# Altium PCB iotv2.PcbDoc
Units mm, origin at the board's own origin, x right, y up, seen from the top; angles counter-clockwise.
Board outline 100 x 100 mm, 2 copper layers (Top Layer, Bottom Layer); 52 components, 46 nets, 156 pads, 0 vias.
Unrouted connection lines stored in the file: 1.
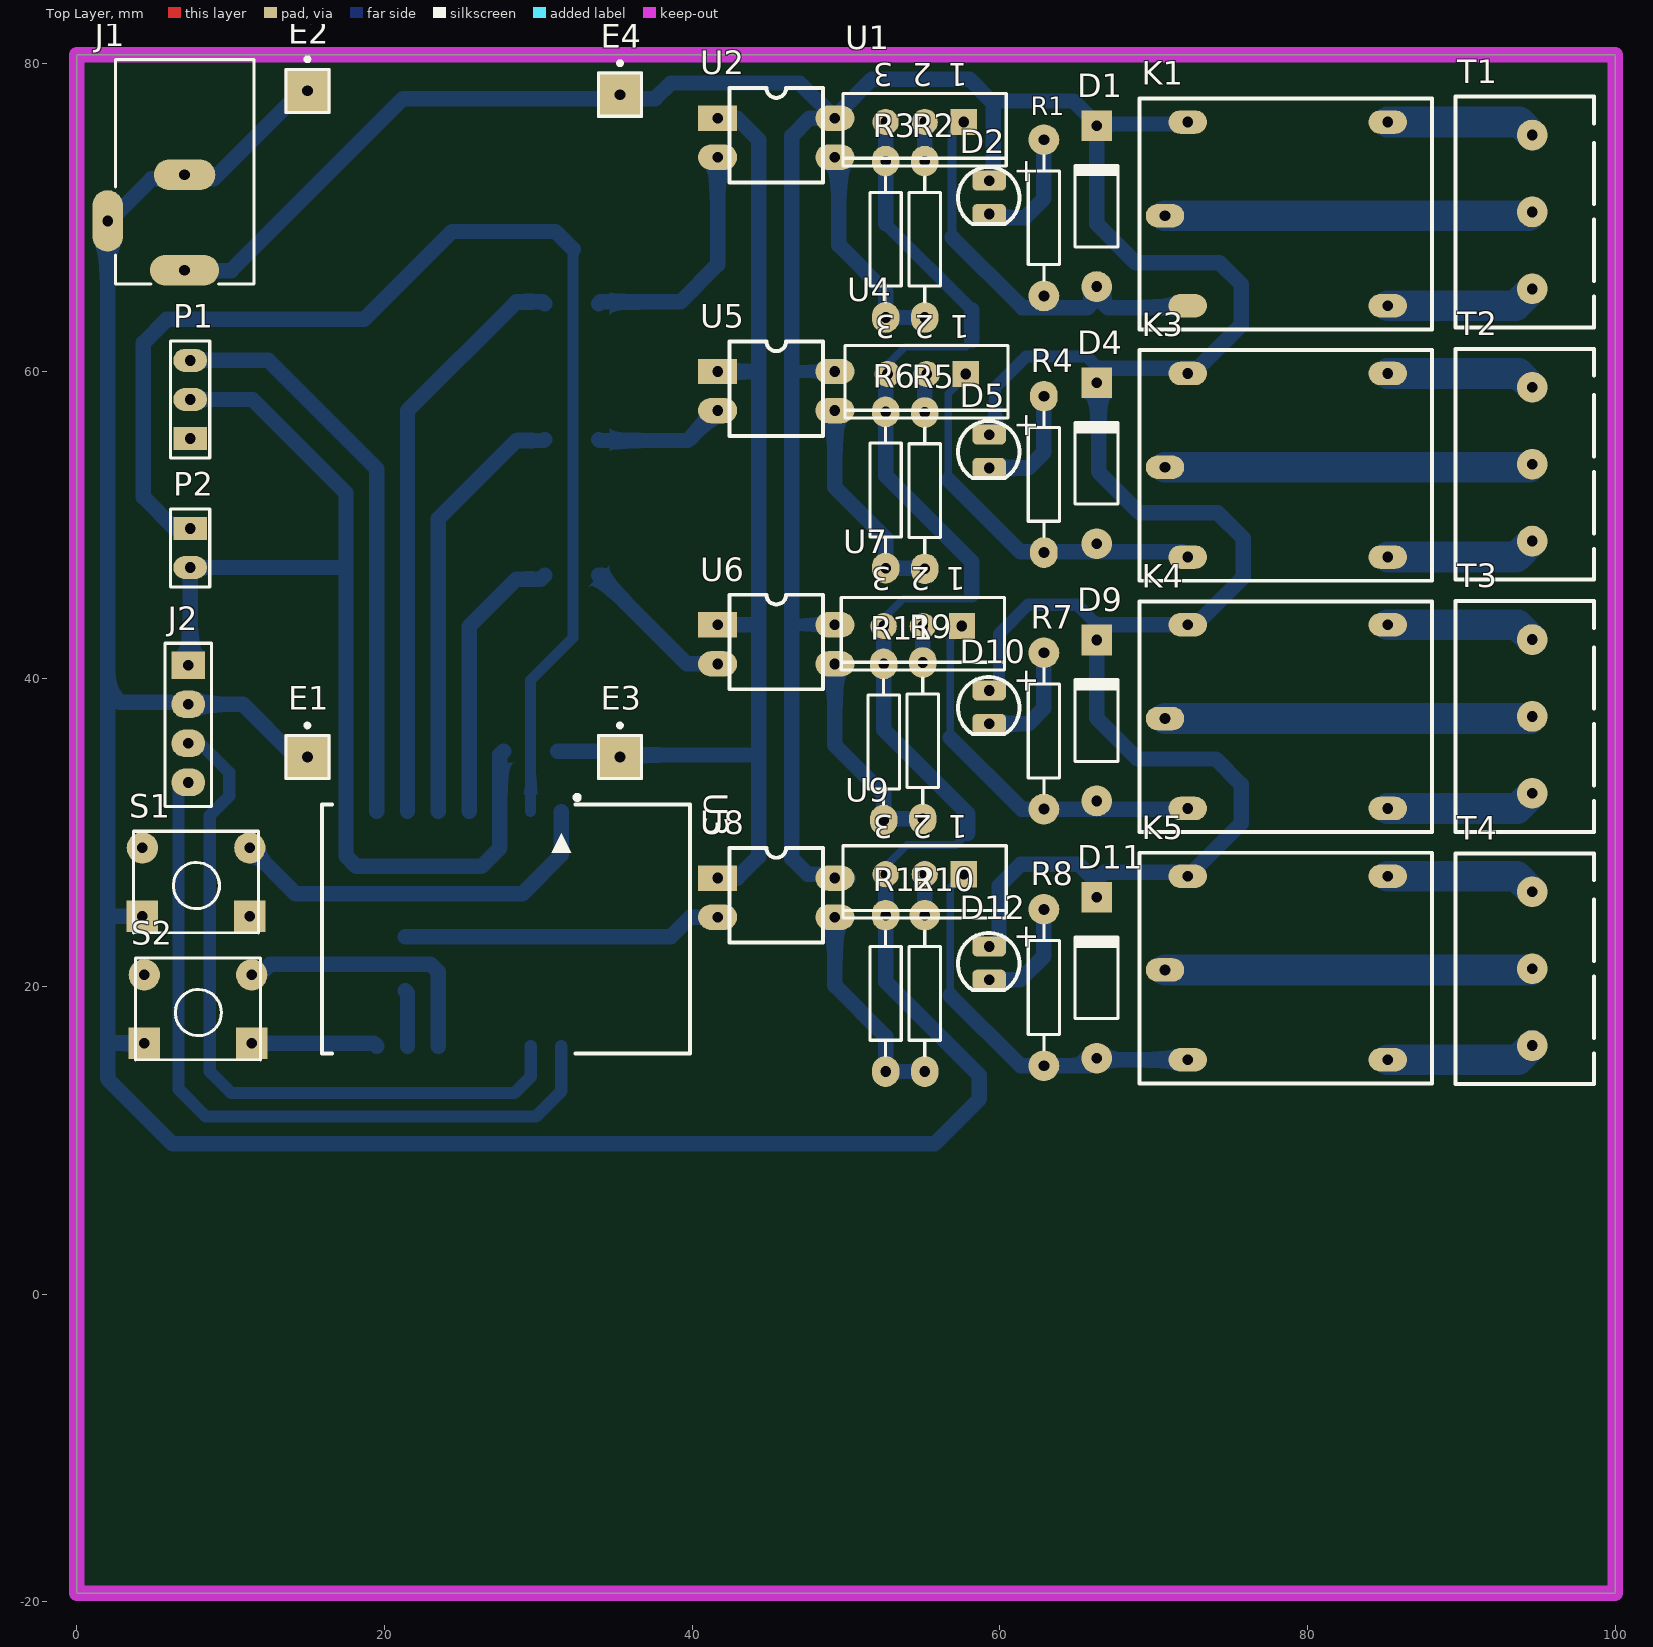
[diagram p0: Top Layer view]
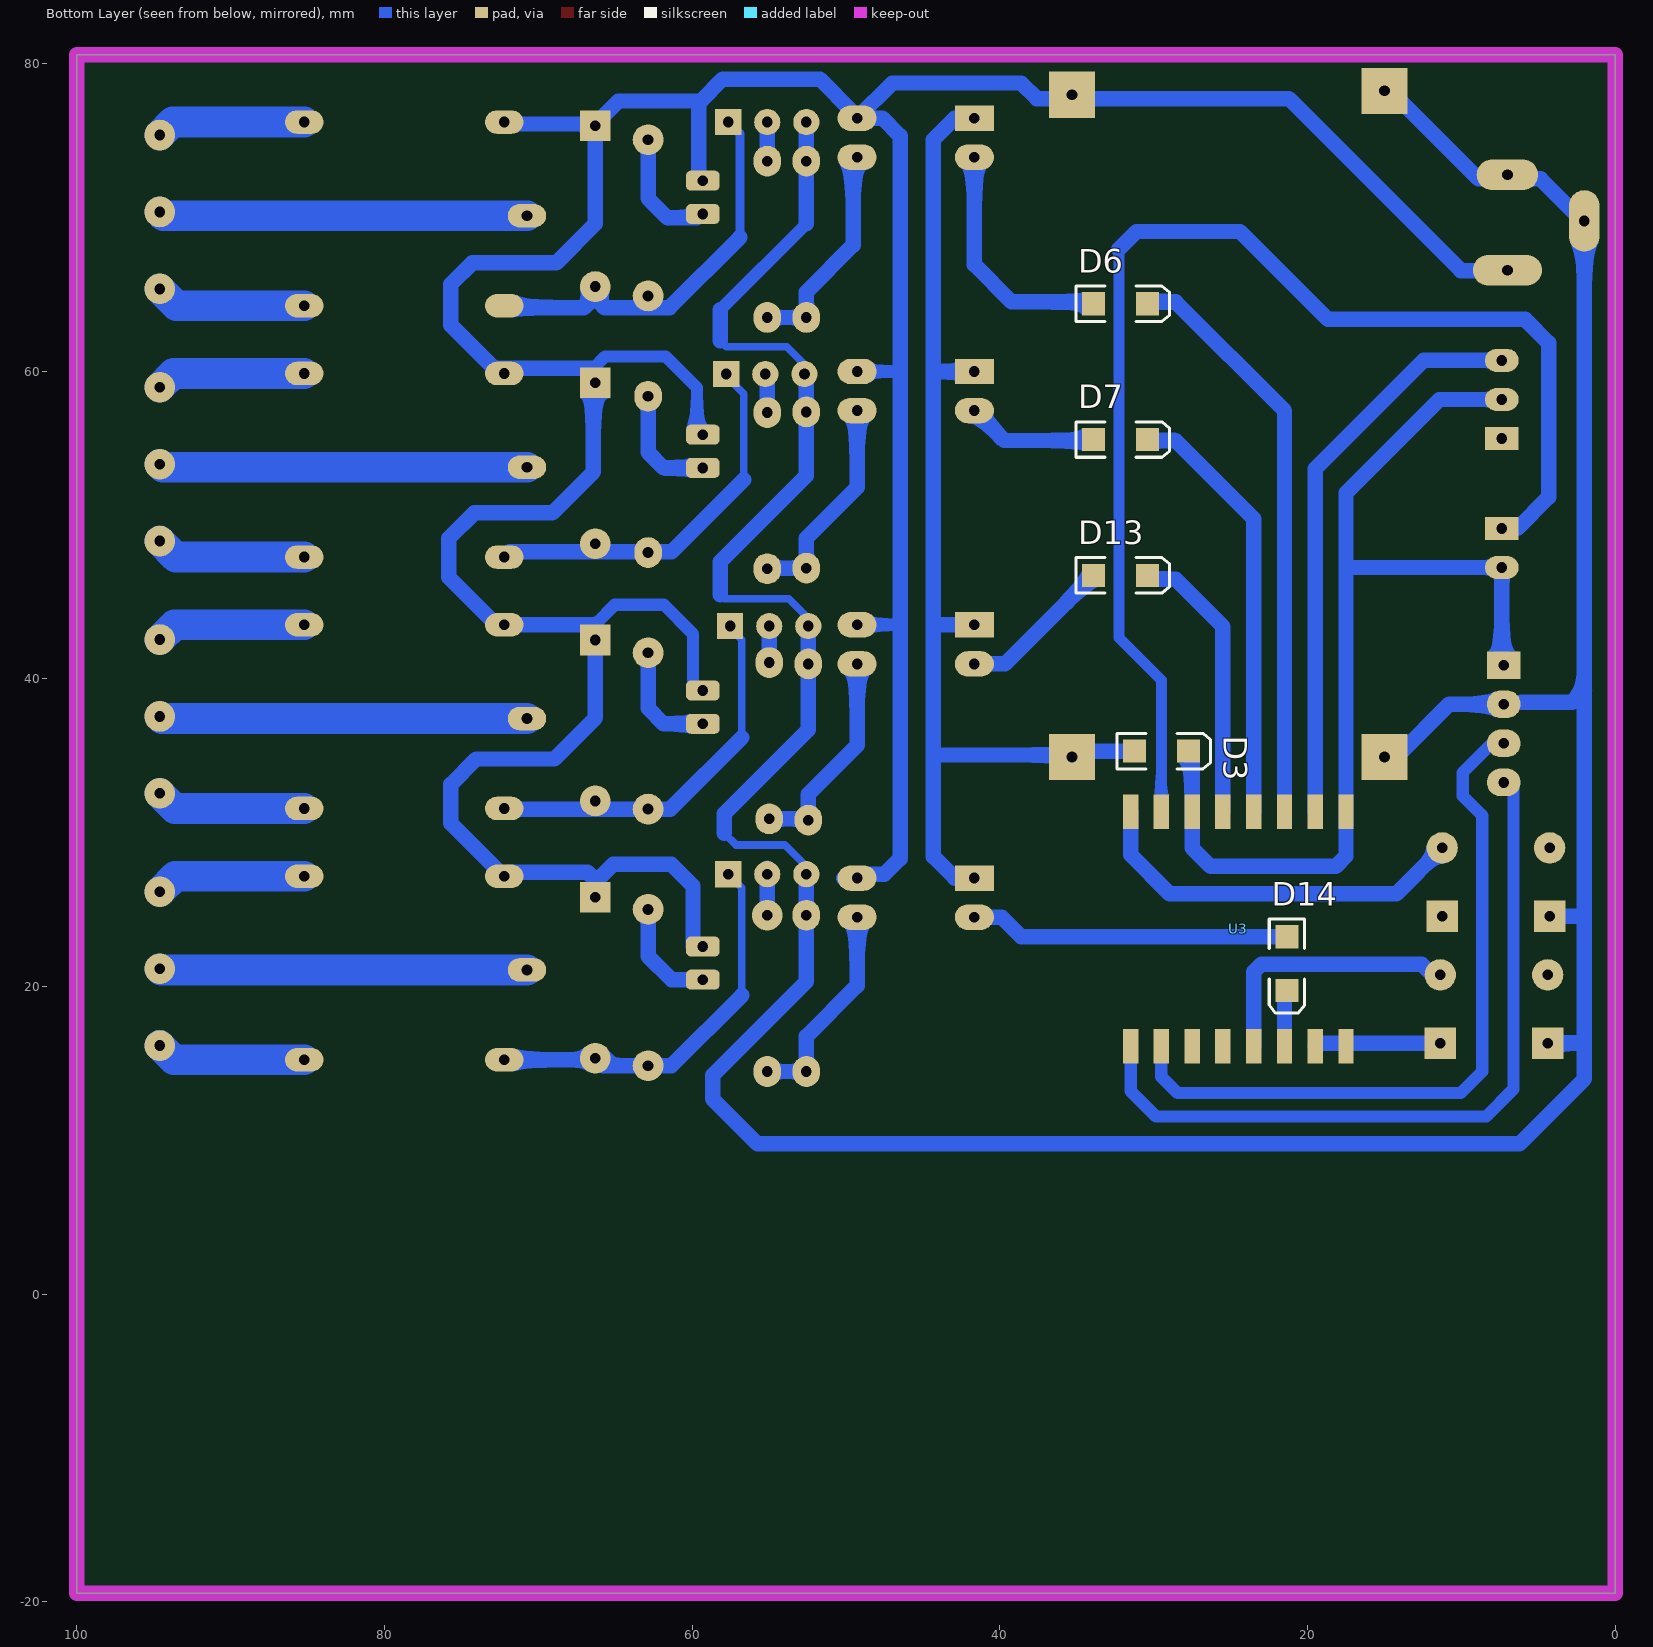
[diagram p1: Bottom Layer view, seen from below]

## Layer stack, top to bottom
Top Solder: solder mask 0.0102, Solder Resist, Dk 3.5
Top Layer: signal copper 0.0356
Dielectric 1: dielectric 0.32, FR-4, Dk 4.8
Bottom Layer: signal copper 0.0356
Bottom Solder: solder mask 0.0102, Solder Resist, Dk 3.5

## Board outline
0,-19.431 100,-19.431 100,80.569 0,80.569

## Design rules (kind name [scope] priority, off if disabled: settings)
Clearance [All] p1: gap=0.254 ignorepadtopadclearanceinfootprint=FALSE except(0: Arc-Hole Track-Hole SMDPad-Hole THPad-Hole Via-Hole Fill-Hole Poly-Hole Region-Hole Text-Hole)
PolygonConnect [All] p1: connectstyle=Relief reliefconductorwidth=0.254 reliefentries=4 polygonreliefangle="90 Angle" airgapwidth=0.254
RoomDefinition iotv2 [InComponentClass('iotv2')] p1: confinementstyle=ConfineIn formatcopy=TRUE lockcomponents=FALSE outline 144.907,-24.003 247.904,-24.003 247.904,4.064 144.907,4.064
RoutingLayers [All] p1: top layer_v5=FALSE bottom layer_v5=TRUE
RoutingVias [All] p1: holewidth=0.711 width=2.5 viastyle="Through Hole" minholewidth=0.711 minwidth=1.27 maxholewidth=0.711 maxwidth=2
SolderMaskExpansion [All] p1: expansion=0.102
Width [All] p1: maxlimit=2 minlimit=0.5 preferedwidth=1
29 further rules are at their usual default settings.

## Components (designator, comment, footprint, x,y, rotation, side; value= is the part's Value field where it differs from the comment)
D1 "Diode 1N4007" DO-41 66.294,70.739 r90 top
D2 "LED 3mm" LED-3mm 59.182,71.374 r0 top
D3 "D Tunnel1" 3.2X1.6X1.1 29.492,35.306 r180 bottom
D4 "Diode 1N4007" DO-41 66.294,54.017 r90 top
D5 "LED 3mm" LED-3mm 59.182,54.864 r0 top
D6 "D Tunnel1" 3.2X1.6X1.1 32.159,64.389 r180 bottom
D7 "D Tunnel1" 3.2X1.6X1.1 32.159,55.562 r180 bottom
D9 "Diode 1N4007" DO-41 66.294,37.296 r90 top
D10 "LED 3mm" LED-3mm 59.182,38.227 r0 top
D11 "Diode 1N4007" DO-41 66.294,20.574 r90 top
D12 "LED 3mm" LED-3mm 59.182,21.59 r0 top
D13 "D Tunnel1" 3.2X1.6X1.1 32.159,46.736 r180 bottom
D14 "D Tunnel1" 3.2X1.6X1.1 21.336,21.491 r270 bottom
E1 "Antenna" PIN1 14.986,34.925 r0 top
E2 "Antenna" PIN1 14.986,78.232 r0 top
E3 "Antenna" PIN1 35.306,34.925 r0 top
E4 "Antenna" PIN1 35.306,77.978 r0 top
J1 "PWR2.5" KLD-0202 7.001,80.271 r270 top
J2 "Header4X1" "HEADER 4X1" 7.239,40.894 r270 top
K1 "Relay-12vDC" Relays#1 69.088,77.724 r270 top
K3 "Relay-12vDC" Relays#2 69.088,61.383 r270 top
K4 "Relay-12vDC" Relays#2 69.088,45.043 r270 top
K5 "Relay-12vDC" Relays#2 69.088,28.702 r270 top
P1 "Header 3" HDR1X3 7.366,55.626 r90 top
P2 "Header 2" HDR1X2 7.366,49.784 r270 top
R1 "Res2" AXIAL-0.4#1 62.865,69.977 r270 top value=1K
R2 "Res2" AXIAL-0.4#2 55.118,68.58 r90 top value=1K
R3 "Res2" AXIAL-0.4#2 52.578,68.58 r90 top value=1K
R4 "Res2" AXIAL-0.4#2 62.865,53.298 r270 top value=1K
R5 "Res2" AXIAL-0.4#2 55.118,52.239 r90 top value=1K
R6 "Res2" AXIAL-0.4#2 52.578,52.282 r90 top value=1K
R7 "Res2" AXIAL-0.4#1 62.865,36.618 r270 top value=1K
R8 "Res2" AXIAL-0.4#1 62.865,19.939 r270 top value=1K
R9 "Res2" AXIAL-0.4#2 54.991,35.983 r90 top value=1K
R10 "Res2" AXIAL-0.4#3 55.118,19.558 r90 top value=1K
R11 "Res2" AXIAL-0.4#2 52.451,35.899 r90 top value=1K
R12 "Res2" AXIAL-0.4#2 52.578,19.558 r90 top value=1K
S1 "PUSH BUTTON DOUBLE" "PUSH BUTTON" 7.747,26.797 r180 top
S2 "PUSH BUTTON DOUBLE" "PUSH BUTTON" 7.874,18.542 r180 top
T1 "Terminal" "Terminal 1*3" 98.615,62.858 r90 top
T2 "Terminal" "Terminal 1*3" 98.615,46.459 r90 top
T3 "Terminal" "Terminal 1*3" 98.615,30.061 r90 top
T4 "Terminal" "Terminal 1*3" 98.615,13.662 r90 top
U1 "L4931CV30" TO-220A 55.118,76.2 r180 top
U2 "PC817" DIP4 41.656,76.454 r0 top
U3 "ESP_12" ESP_12 31.496,31.744 r270 top
U4 "L4931CV30" TO-220A 55.245,59.817 r180 top
U5 "PC817" DIP4 41.656,59.986 r0 top
U6 "PC817" DIP4 41.656,43.519 r0 top
U7 "L4931CV30" TO-220A 54.991,43.434 r180 top
U8 "PC817" DIP4 41.656,27.051 r0 top
U9 "L4931CV30" TO-220A 55.118,27.305 r180 top

## Footprints (in the part's own frame and the unit in brackets; to place one, negate y for a bottom-side part, rotate by r counter-clockwise, add the part's x,y. Pads: shape width x height; smd on the part's side, far side on the other; paste and mask are expansions set on the pad)
3.2X1.6X1.1 [mm] "SMT LED; 2 Flat Leads"
  rect 1.5x1.5 smd: 1(-1.75,0) 2(1.75,0)
  silkscreen extent -2.9,-1.15 3.2,1.15
AXIAL-0.4#1 [mm] "Axial Device, Thru-Hole; 2 Leads; 0.4 in Pin Spacing"
  round 2 hole 0.7: 1(-5.08,0) 2(5.08,0)
  silkscreen extent -4.06,-1.02 4.06,1.02
AXIAL-0.4#2 [mm] "Axial Device, Thru-Hole; 2 Leads; 0.4 in Pin Spacing"
  oval 2x1.8 hole 0.7: 1(-5.08,0) 2(5.08,0)
  silkscreen extent -4.06,-1.02 4.06,1.02
AXIAL-0.4#3 [mm] "Axial Device, Thru-Hole; 2 Leads; 0.4 in Pin Spacing"
  oval 2x1.8 hole 0.7: 1(-5.08,0)
  round 2 hole 0.7: 2(5.08,0)
  silkscreen extent -4.06,-1.02 4.06,1.02
DIP4 [mm]
  rect 2.54x1.651 hole 0.7: 1(0,0)
  oval 2.54x1.651 hole 0.7: 2(0,-2.54) 3(7.62,-2.54) 4(7.62,0)
  silkscreen extent 0.76,-4.19 6.86,1.96, body extent -0.13,-3.56 7.75,1.03, height 4.3
DO-41 [mm] "Diode, Axial; Body 5.2 x 2.7 mm (LxDia. max), Lead Dia. 0.86 mm (max)"
  round 2 hole 0.7: 1(-5.23,0)
  rect 2x2 hole 0.7: 2(5.23,0)
  silkscreen extent -2.65,-1.4 2.75,1.4
ESP_12 [mm] "ESP-12 Wi-Fi Module by AI-Thinker"
  rect 2.25x1 smd far side: 1(0.375,0) 2(0.375,-2) 3(0.375,-4) 4(0.375,-6) 5(0.375,-8) 6(0.375,-10) 7(0.375,-12) 8(0.375,-14) 9(15.625,-14) 10(15.625,-12) 11(15.625,-10) 12(15.625,-8) 13(15.625,-6) 14(15.625,-4) 15(15.625,-2) 16(15.625,0)
  silkscreen extent -0.7,-15.57 16.08,8.37, body extent 0,-15.49 16,8.51, height 2.75
HDR1X2 [mm] "Connector; Header; 2 Position"
  rect 1.5x2.2 hole 0.7: 1(0,0)
  oval 1.5x2.2 hole 0.7: 2(2.54,0)
  silkscreen extent -1.27,-1.27 3.81,1.27
HDR1X3 [mm] "Connector; Header; 3 Position"
  rect 1.5x2.2 hole 0.7: 1(0,0)
  oval 1.5x2.2 hole 0.7: 2(2.54,0) 3(5.08,0)
  silkscreen extent -1.27,-1.27 6.35,1.27
"HEADER 4X1" [mm]
  rect 1.8x2.2 hole 0.7: 1(0,0)
  oval 1.8x2.2 hole 0.7: 2(2.54,0) 3(5.08,0) 4(7.62,0)
  silkscreen extent -1.43,-1.5 9.18,1.5, body extent -1.19,-1.22 8.97,1.32, height 8.38
KLD-0202 [mm] "DC Power Jack, 2.5mm, KLD Series, PCB Mount"
  oval 2x4.5 hole 0.7: 1(13.7,0)
  round 1.5 all layers, no hole: 1A(13.7,-1.25) 1B(13.7,1.25) 2A(7.5,-1) 2B(7.5,1) 3A(9.5,-5) 3B(11.5,-5)
  oval 2x4 hole 0.7: 2(7.5,0)
  oval 4x2 hole 0.7: 3(10.5,-5)
  silkscreen extent 0,-4.5 14.6,4.5
LED-3mm [mm] "LED; 2 Leads"
  rrect50% 2.2x1.3 hole 0.7: 1(0.127,1.016) 2(0.127,-1.143)
  silkscreen extent -1.9,-1.81 2.09,1.89
PIN1 [mm] "Generic Antenna; 1 Lead"
  rect 3x3 hole 0.7: 1(0,0)
  silkscreen extent -1.4,-1.4 1.4,2.17
"PUSH BUTTON" [mil]
  rect 80x80 hole 27.56: 1(-137.5,87.5) 2(137.5,87.5)
  round 80 hole 27.56: 3(-137.5,-87.5) 4(137.5,-87.5)
  silkscreen extent -160,-130 160,130, body extent -155,-121 157,123, height 205
Relays#1 [mil]
  oval 60x98.43 hole 27.56: 1(300,65) 2(60,635) 3(530,635) 4(60,123.11)
  oval 60x98.43 all layers, no hole: 5(530,123.11)
  silkscreen extent 0,0 591,748
Relays#2 [mil]
  oval 60x98.43 hole 27.56: 1(300,65) 2(60,635) 3(530,635) 4(60,123.11) 5(530,123.11)
  silkscreen extent 0,0 591,748
"Terminal 1*3" [mm]
  round 2 hole 0.7: 1(2.5,4) 2(7.5,4) 3(12.5,4)
  silkscreen extent 0,0 15,9
TO-220A [mm] "TO, Thru-Hole, Vertical, Heatsink Mounted; 3 In-Line Leads; Pitch 2.54 mm"
  rect 1.7x1.7 hole 0.7: 1(-2.54,0)
  round 1.7 hole 0.7: 2(0,0) 3(2.54,0)
  silkscreen extent -5.3,-1.85 5.3,2.85

## Part data
D1 D4 D9 D11: "1 Amp General Purpose Rectifier", Code_JEDEC=DO-204-AL, ComponentLink1Description="Manufacturer Link", ComponentLink1URL=http://www.fairchildsemi.com/, ComponentLink2Description=Datasheet, ComponentLink2URL=http://www.fairchildsemi.com/ds/1N%2F1N4001.pdf, DatasheetVersion=1998, LatestRevisionDate=17-Jul-2002, LatestRevisionNote="Re-released for DXP Platform.", PackageDescription="Diode, Axial; Body 5.2 x 2.7 mm (LxDia. max), Lead Dia. 0.86 mm (max)", PackageReference=DO-41, PackageVersion=Aug-1999, Published=8-Jun-2000, Publisher="Altium Limited"
D2 D5 D10 D12: "Typical LED", Designer="Seyed Mohsen Ghasemian", PackageDescription="LED; 2 Leads", PackageReference=LED, Published=02/04/2012, Publisher=www.picpars.com
D3 D6 D7 D13 D14: "Tunnel Diode - RLC Model", LatestRevisionDate=17-Jul-2002, LatestRevisionNote="Re-released for DXP Platform.", PackageDescription="SM LED; 2 Flat Leads", PackageReference=3.2X1.6X1.1, PackageVersion=Feb-2002, Published=8-Jun-2000, Publisher="Altium Limited"
E1 E2 E3 E4: "Generic Antenna", LatestRevisionDate=17-Jul-2002, LatestRevisionNote="Re-released for DXP Platform.", PackageReference=PIN1, Published=24-Mar-1999, Publisher="Altium Limited"
J1: "Low Voltage Power Supply Connector", ComponentLink1Description="Manufacturer Link", ComponentLink1URL=http://domino.kycon.com/internet/Products.html, DatasheetDocument=09-May-2002, Published=17-Dec-2003, Publisher="Altium Limited"
K1 K3 K4 K5: library part Relay-05vDC, "Relay-05vDC-240AC 5A", ComponentLinkURL=www.picpars.com, Designer="Seyed Mohsen Ghasemain"
P1: "Header, 3-Pin", LatestRevisionDate=17-Jul-2002, LatestRevisionNote="Re-released for DXP Platform.", Publisher="Altium Limited"
P2: "Header, 2-Pin", LatestRevisionDate=17-Jul-2002, LatestRevisionNote="Re-released for DXP Platform.", Publisher="Altium Limited"
R1 R2 R3 R4 R5 R6 R7 R8 R9 R10 R11 R12: "Resistor", LatestRevisionDate=17-Jul-2002, LatestRevisionNote="Re-released for DXP Platform.", PackageDescription="Axial Device, Thru-Hole; 2 Leads; 0.4 in Pin Spacing", PackageReference=AXIAL-0.4, Published=8-Jun-2000, Publisher="Altium Limited"
S1 S2: "Switch"
T1 T2 T3 T4: library part "Terminal 1*3", "Terminal 3 Pin 250VAC 16A", ComponentLinkURL=www.picpars.com, Designer="Seyed Mohsen Ghasemain", E-mail=picpars@gmail.com
U1 U4 U7 U9: "250mA, Very Low Drop ( 0.4V) Voltage Regulator", ComponentLink1Description="Manufacturer Link", ComponentLink1URL=http://www.st.com/, ComponentLink2Description=Datasheet, ComponentLink2URL=http://www.st.com/stonline/products/literature/ds/4340/l4931abxx15.pdf, DatasheetVersion=Apr-1999, LatestRevisionDate=06-Jun-2005, LatestRevisionNote="PCB Pin sequence re-ordered.", PackageDescription="TO, Thru-Hole, Vertical, Heatsink Mounted; 3 In-Line Leads; Pitch 2.54 mm", PackageReference=TO-220A, PackageVersion=Jul-2004, Published=24-Aug-2001, Publisher="Altium Limited"
U2 U5 U6 U8: library part OPTCOUPLER_01, "4-Pin Phototransistor Optocoupler"
U3: "ESP-12 Wi-Fi Module by AI-Thinker", IC=ESP8266-EX, Vendor=Ai-thinker

## Nets (pads, with @x,y where several pads share a name; then routed paths per layer and width w, separated by ;. In a path a pad name is that pad's centre, name@x,y a point inside that pad or via, vN(x,y) a via of type N, cw(c..) or ccw(c..) an arc to the next point about the centre after c; other vN are vias at no path point)
ADC: P2.1 U3.2 | length 83
  Bottom Layer w0.7: U3.2@29.496,31.379 29.496,39.91 32.258,42.672 32.258,67.945
  Bottom Layer w1: P2.1 6.35,49.784 4.318,51.816 4.318,61.849 5.842,63.373 18.669,63.373 24.384,69.088 31.115,69.088 32.258,67.945
btn: S2.3 U3.12 | length 17.5
  Bottom Layer w1: S2.3 11.874,20.764 12.573,21.463 22.987,21.463 23.496,20.954 U3.12@23.496,16.129
dht: P1.3 U3.7 | length 37.3
  Bottom Layer w1: P1.3 12.446,60.706 19.496,53.656 U3.7@19.496,31.379
GND: E1.1 E2.1 J1.2 J1.2A J1.2B J1.3 J1.3A J1.3B J2.2 R3.2 R6.2 R11.2 R12.2 S1.2 S2.2 U1.3 U4.3 U7.3 U9.3 | length 237.3
  Bottom Layer w0.5: 2.001,20.955 2.191,20.764 ; U7.3 52.451,43.942 53.721,45.212 57.912,45.212 58.166,45.466 ; U9.3 52.451,27.432 52.451,27.686 53.975,29.21 57.15,29.21 57.912,29.972 ; U4.3 52.705,60.452 53.848,61.595 57.785,61.595 58.166,61.976
  Bottom Layer w0.8: 52.578,69.596 58.166,64.008
  Bottom Layer w1: J1.3 J1.3B 2.001,39.274 ; J1.3@2.052,69.72 4.842,72.51 8.001,72.51 8.883,72.51 E2.1@15.113,78.74 ; S1.2 2.318,24.575 2.001,24.892 ; S2.2 2.191,16.319 2.001,16.51 ; 6.096,38.481 2.794,38.481 2.001,39.274 ; J2.2 10.795,38.354 14.097,35.052 E1.1@14.859,35.052 ; U7.3 R11.2 52.451,36.703 57.912,31.242 57.912,29.972 ; U9.3 R12.2 52.578,20.32 58.674,14.224 58.674,12.7 55.753,9.779 6.223,9.779 2.001,14.001 2.001,16.51 ; 52.578,69.596 R3.2 U1.3 ; U4.3 52.578,59.69 R6.2 52.578,53.213 58.166,47.625 58.166,45.466 ; 58.166,61.976 58.166,64.008 ; 2.001,16.51 2.001,20.955 2.001,24.892 ; 2.001,24.892 2.001,39.274
NetD1_1: D1.1 K1.5 R1.2 U1.1 | length 25.7
  Bottom Layer w0.6: 56.896,68.707 56.896,75.438 U1.1
  Bottom Layer w1: 56.896,68.707 61.468,64.135 65.682,64.135 66.294,64.747 66.444,64.747 67.056,64.135 K1.5@72.342,64.135
NetD2_2: D2.2 R1.1 | length 7.1
  Bottom Layer w1: D2.2@59.69,69.977 61.595,69.977 62.865,71.247 R1.1@62.865,74.676
NetD4_1: D4.1 K3.5 R4.2 U4.1 | length 25.4
  Bottom Layer w0.5: 56.642,52.959 56.642,58.547 57.785,59.69 U4.1 U4.1@57.531,59.563
  Bottom Layer w1: 56.642,52.959 61.341,48.26 66.294,48.26 71.876,48.26 K3.5
NetD5_2: D5.2 R4.1 | length 7.6
  Bottom Layer w1: D5.2 61.849,53.721 62.865,54.737 R4.1
NetD6_1: D6.1 U2.2 | length 15.8
  Bottom Layer w1: D6.1 34.036,64.516 39.243,64.516 41.656,66.929 U2.2
NetD7_1: D7.1 U5.2 | length 8.6
  Bottom Layer w1: D7.1 33.972,55.499 39.709,55.499 U5.2
NetD9_1: D9.1 K4.5 R7.2 U7.1 | length 24.9
  Bottom Layer w0.5: 56.769,36.195 56.769,42.545 57.531,43.307 U7.1
  Bottom Layer w1: 56.769,36.195 61.426,31.538 R7.2 72.173,31.538 K4.5
NetD10_2: D10.2 R7.1 | length 7.6
  Bottom Layer w1: D10.2 61.849,37.084 62.865,38.1 R7.1
NetD11_1: D11.1 K5.5 R8.2 U9.1 | length 25.8
  Bottom Layer w0.5: 56.769,19.431 56.769,26.416 U9.1
  Bottom Layer w1: 56.769,19.431 61.341,14.859 R8.2 65.809,14.859 D11.1 66.398,15.24 K5.5
NetD12_2: D12.2 R8.1 | length 7.1
  Bottom Layer w1: D12.2@59.436,20.447 61.341,20.447 62.865,21.971 R8.1
NetD13_1: D13.1 U6.2 | length 10.4
  Bottom Layer w1: D13.1@34.159,46.736 D13.1 39.666,40.979 U6.2
NetD14_1: D14.1 U8.2 | length 20.8
  Bottom Layer w1: D14.1 38.608,23.241 39.878,24.511 U8.2
NetK1_1: K1.1 T1.2 | length 24
  Bottom Layer w2: K1.1 94.361,70.104 T1.2
NetK1_2: K1.2 T1.3 | length 9.7
  Bottom Layer w2: K1.2 93.773,76.2 T1.3
NetK1_3: K1.3 T1.1 | length 9.9
  Bottom Layer w2: K1.3 93.519,64.262 T1.1
NetK3_1: K3.1 T2.2 | length 24
  Bottom Layer w2: K3.1 94.419,53.763 T2.2
NetK3_2: K3.2 T2.3 | length 9.8
  Bottom Layer w2: K3.2 93.715,59.859 T2.3
NetK3_3: K3.3 T2.1 | length 9.8
  Bottom Layer w2: K3.3 93.577,47.921 T2.1
NetK4_1: K4.1 T3.2 | length 23.9
  Bottom Layer w2: K4.1 94.477,37.423 T3.2
NetK4_2: K4.2 T3.3 | length 9.8
  Bottom Layer w2: K4.2 93.657,43.519 T3.3
NetK4_3: K4.3 T3.1 | length 9.8
  Bottom Layer w2: K4.3 93.635,31.581 T3.1
NetK5_1: K5.1 T4.2 | length 23.9
  Bottom Layer w2: K5.1 94.535,21.082 T4.2
NetK5_2: K5.2 T4.3 | length 9.8
  Bottom Layer w2: K5.2 93.599,27.178 T4.3
NetK5_3: K5.3 T4.1 | length 9.8
  Bottom Layer w2: K5.3 93.693,15.24 T4.1
NetR2_1: R2.1 R3.1 U2.3 | length 14.1
  Bottom Layer w1: U2.3@49.53,73.914 49.53,68.199 52.578,65.151 52.578,63.754 52.832,63.5 R2.1
NetR2_2: R2.2 U1.2 | length 2.9
  Bottom Layer w0.5: R2.2@55.118,73.152 R2.2@55.372,73.406
  Bottom Layer w1: R2.2 U1.2
NetR5_1: R5.1 R6.1 U5.3 | length 14.2
  Bottom Layer w1: U5.3 49.276,52.451 52.578,49.149 R6.1 55.076,47.202 R5.1
NetR5_2: R5.2 U4.2 | length 2.6
  Bottom Layer w1: R5.2 55.118,59.69 U4.2
NetR9_1: R9.1 R11.1 U6.3 | length 14.1
  Bottom Layer w1: U6.3 49.276,35.687 52.451,32.512 R11.1 52.536,30.903 R9.1
NetR9_2: R9.2 U7.2 | length 2.4
  Bottom Layer w1: R9.2 U7.2
NetR10_1: R10.1 R12.1 U8.3 | length 13.9
  Bottom Layer w1: U8.3 49.276,20.066 52.578,16.764 R12.1 R10.1
NetR10_2: R10.2 U9.2 | length 3
  Bottom Layer w1: R10.2 U9.2 U9.2@55.118,27.686
NetS2_1: S2.1 U3.9 U3.10 | length 8.2
  Bottom Layer w1: S2.1 19.305,16.319 U3.10@19.496,16.129
O1: D6.2 U3.6 | length 38
  Bottom Layer w1: U3.6@21.496,31.379 21.496,57.437 28.575,64.516 30.282,64.516 D6.2
O2: D7.2 U3.5 | length 28.1
  Bottom Layer w1: U3.5@23.496,31.379 23.496,50.42 28.575,55.499 30.345,55.499 D7.2
O3: D13.2 U3.4 | length 18.3
  Bottom Layer w1: U3.4@25.496,31.379 25.496,43.403 28.575,46.482 30.155,46.482 D13.2
O4: D14.2 U3.11 | length 3.7
  Bottom Layer w1: D14.2 21.496,19.581 U3.11
rst: S1.3 U3.1 | length 25.3
  Bottom Layer w1: S1.3 14.224,26.035 28.956,26.035 31.496,28.575 U3.1 U3.1@31.496,31.379
rx: J2.3 U3.15 | length 47.3
  Bottom Layer w0.5: J2.3 J2.3@8.001,35.814
  Bottom Layer w0.8: J2.3@8.001,35.814 9.906,33.909 9.906,32.385 8.636,31.115 8.636,14.478 10.033,13.081 28.448,13.081 29.496,14.129 U3.15 U3.15@29.496,16.129
tx: J2.4 U3.16 | length 49.8
  Bottom Layer w0.5: J2.4@6.604,33.274 J2.4
  Bottom Layer w0.8: J2.4@6.604,33.274 6.604,13.335 8.382,11.557 29.845,11.557 31.496,13.208 U3.16 U3.16@31.496,16.129
VCC: D1.2 D2.1 D4.2 D5.1 D9.2 D10.1 D11.2 D12.1 E4.1 J1.1 J1.1A J1.1B K1.4 K3.4 K4.4 K5.4 U2.4 U5.4 U6.4 U8.4 | length 266.1
  Bottom Layer w0.5: 66.23,43.624 66.294,43.561 66.294,43.519 66.294,42.672 D9.2
  Bottom Layer w0.8: 46.482,43.561 46.524,43.519 U6.4 ; 46.482,60.325 46.821,59.986 U5.4 ; D5.1@59.69,55.88 59.69,58.928 61.722,60.96 65.659,60.96 D4.2@66.421,60.198 ; D10.1@59.944,39.497 59.944,42.926 61.849,44.831 65.024,44.831 66.23,43.624 ; D9.2@66.739,43.116 D9.2@66.812,43.043
  Bottom Layer w1: J1.1 7.024,66.548 10.033,66.548 21.209,77.724 37.592,77.724 38.608,78.74 46.99,78.74 U2.4 47.625,76.454 46.482,75.311 46.482,60.325 46.482,43.561 46.482,28.321 47.498,27.305 49.022,27.305 U8.4 U8.4@50.165,27.051 ; U2.4@49.53,76.454 49.53,76.835 51.689,78.994 58.015,78.994 59.436,77.573 ; D2.1@59.563,72.39 59.563,77.446 59.436,77.573 ; D12.1@59.944,22.606 59.944,26.543 61.341,27.94 65.151,27.94 D11.2@66.294,26.797 ; D11.2 D11.2@66.294,26.797 ; D9.2 66.294,37.465 68.961,34.798 74.041,34.798 75.692,33.147 75.692,30.607 K5.4@72.602,27.517 ; D9.2@66.294,42.672 D9.2@66.739,43.116 ; 66.294,43.561 66.252,43.519 66.294,43.519 K4.4 72.729,43.519 75.819,46.609 75.819,49.149 74.168,50.8 69.088,50.8 66.421,53.467 66.421,59.12 D4.2 ; D4.2@66.421,60.198 72.898,60.198 75.692,62.992 75.692,65.659 74.295,67.056 68.834,67.056 66.294,69.596 D1.2@66.294,75.207 ; K5.4 71.961,27.432 66.802,27.432 66.294,26.924 D11.2@66.294,26.797 ; K1.4@72.342,76.073 67.16,76.073 D1.2@66.294,75.207 ; 59.436,77.573 64.794,77.573 66.294,76.073 D1.2 D1.2@66.294,75.207
VDD: D3.1 D3.2 E3.1 J2.1 P1.2 P2.2 U2.1 U3.3 U3.8 U5.1 U6.1 U8.1 | length 141.9
  Bottom Layer w1: J2.1 7.366,41.021 P2.2 17.369,47.244 17.496,47.371 ; P1.2 11.43,58.166 17.496,52.1 17.496,47.371 ; D3.2 27.496,35.06 U3.3 27.496,29.02 26.289,27.813 18.161,27.813 17.496,28.478 U3.8 17.496,47.371 ; D3.1 34.925,35.306 35.179,35.052 44.069,35.052 44.323,35.306 ; U8.1 42.926,27.051 44.323,28.448 44.323,35.306 ; U6.1 44.238,43.519 44.323,43.434 ; U5.1 44.111,59.986 44.323,60.198 ; U2.1 42.926,76.454 44.323,75.057 44.323,60.198 ; 44.323,35.306 44.323,43.434 ; 44.323,43.434 44.323,60.198
pads on no net: P1.1 S1.1 S1.4 S2.4 U3.13 U3.14

## Keep-outs
Keep-Out Layer:
  the board outline again, w1

## Text inside footprints (layer, text, board x,y; h text height)
D2: Top Overlay "+" at 62.357,72.136 h1.52 r90
D5: Top Overlay "+" at 62.357,55.626 h1.52 r90
D10: Top Overlay "+" at 62.357,38.989 h1.52 r90
D12: Top Overlay "+" at 62.357,22.352 h1.52 r90
J1: Mechanical 1 "Mech 2 - Clearance, move to internal plane if present" at 12.067,79.985 h0.3 r270; Mechanical 1 "Mech 1 - Slot cut-out" at 12.567,79.985 h0.3 r270; Mechanical 1 "Assign keep-out area to slot" at 13.567,79.985 h0.3 r270; Mechanical 1 "Alert PCB fab to slot details" at 13.067,79.985 h0.3 r270
U1: Top Overlay "3" at 53.078,80.025 h1.5 r180; Top Overlay "2" at 55.618,80.025 h1.5 r180; Top Overlay "1" at 57.908,80.025 h1.5 r180
U3: Mechanical 13 "CUTOUT POLYGON" at 38.862,31.617 h0.25 r270; Mechanical 13 "ANTENNA AREA" at 39.37,31.617 h0.25 r270
U4: Top Overlay "3" at 53.205,63.642 h1.5 r180; Top Overlay "2" at 55.745,63.642 h1.5 r180; Top Overlay "1" at 58.035,63.642 h1.5 r180
U7: Top Overlay "3" at 52.951,47.259 h1.5 r180; Top Overlay "2" at 55.491,47.259 h1.5 r180; Top Overlay "1" at 57.781,47.259 h1.5 r180
U9: Top Overlay "3" at 53.078,31.13 h1.5 r180; Top Overlay "2" at 55.618,31.13 h1.5 r180; Top Overlay "1" at 57.908,31.13 h1.5 r180